# Altium PCB GPRSshield v1.4.pcbdoc
Units mil, origin at the board's own origin, x right, y up, seen from the top; angles counter-clockwise.
Board outline 2957.51 x 2255 mil, 2 copper layers (Top Layer, Bottom Layer); 79 components, 96 nets, 332 pads, 109 vias.
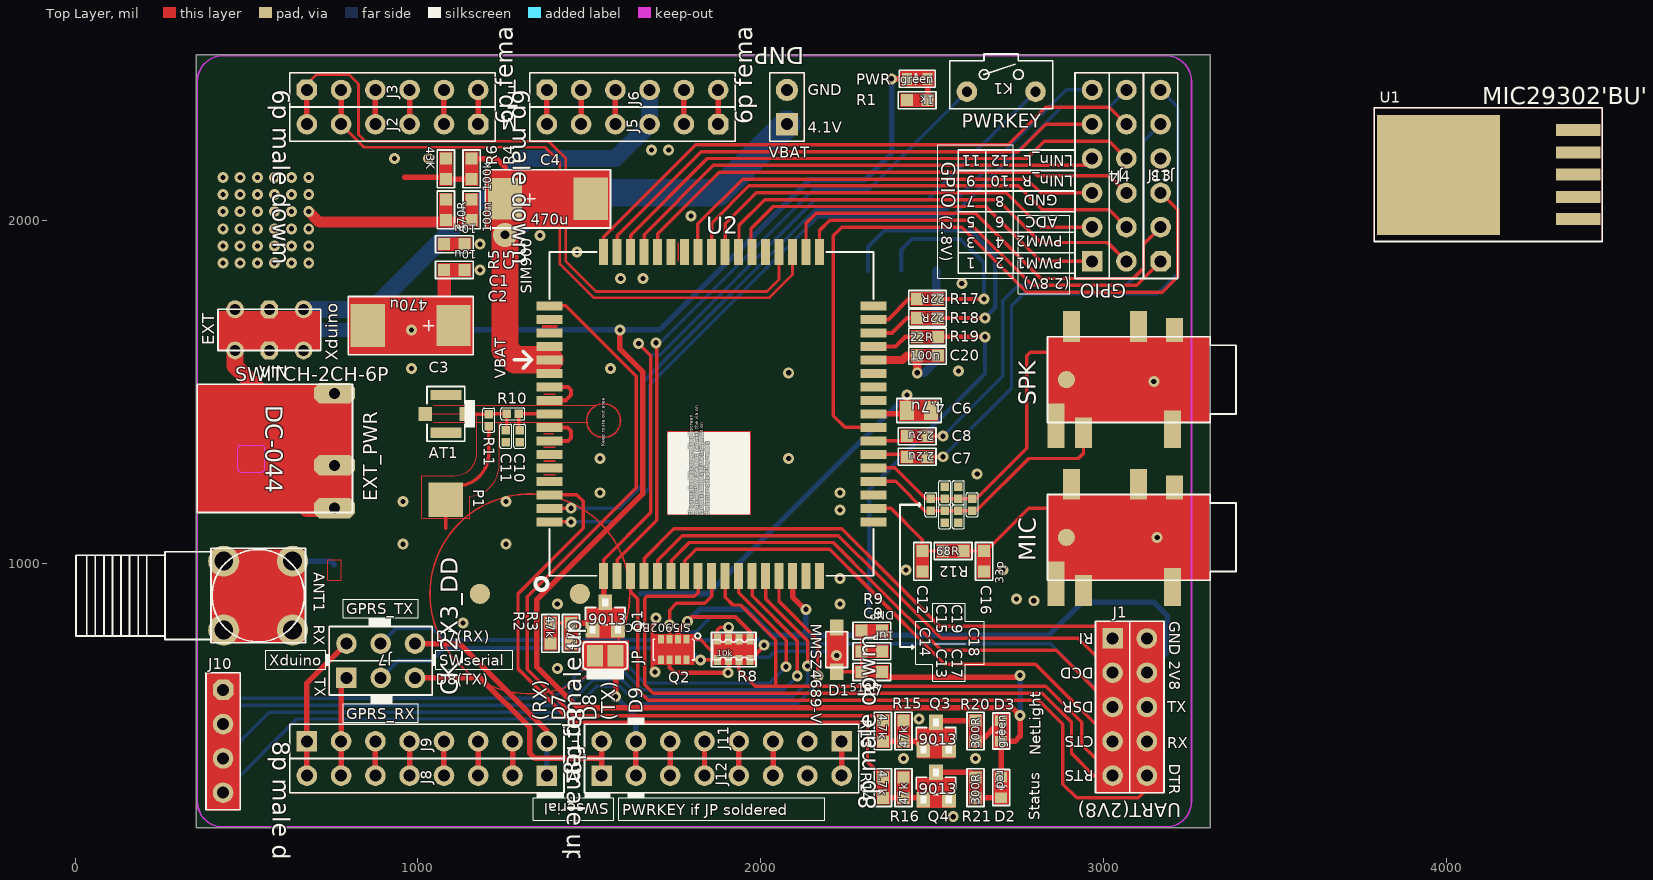
[diagram p0: Top Layer view]
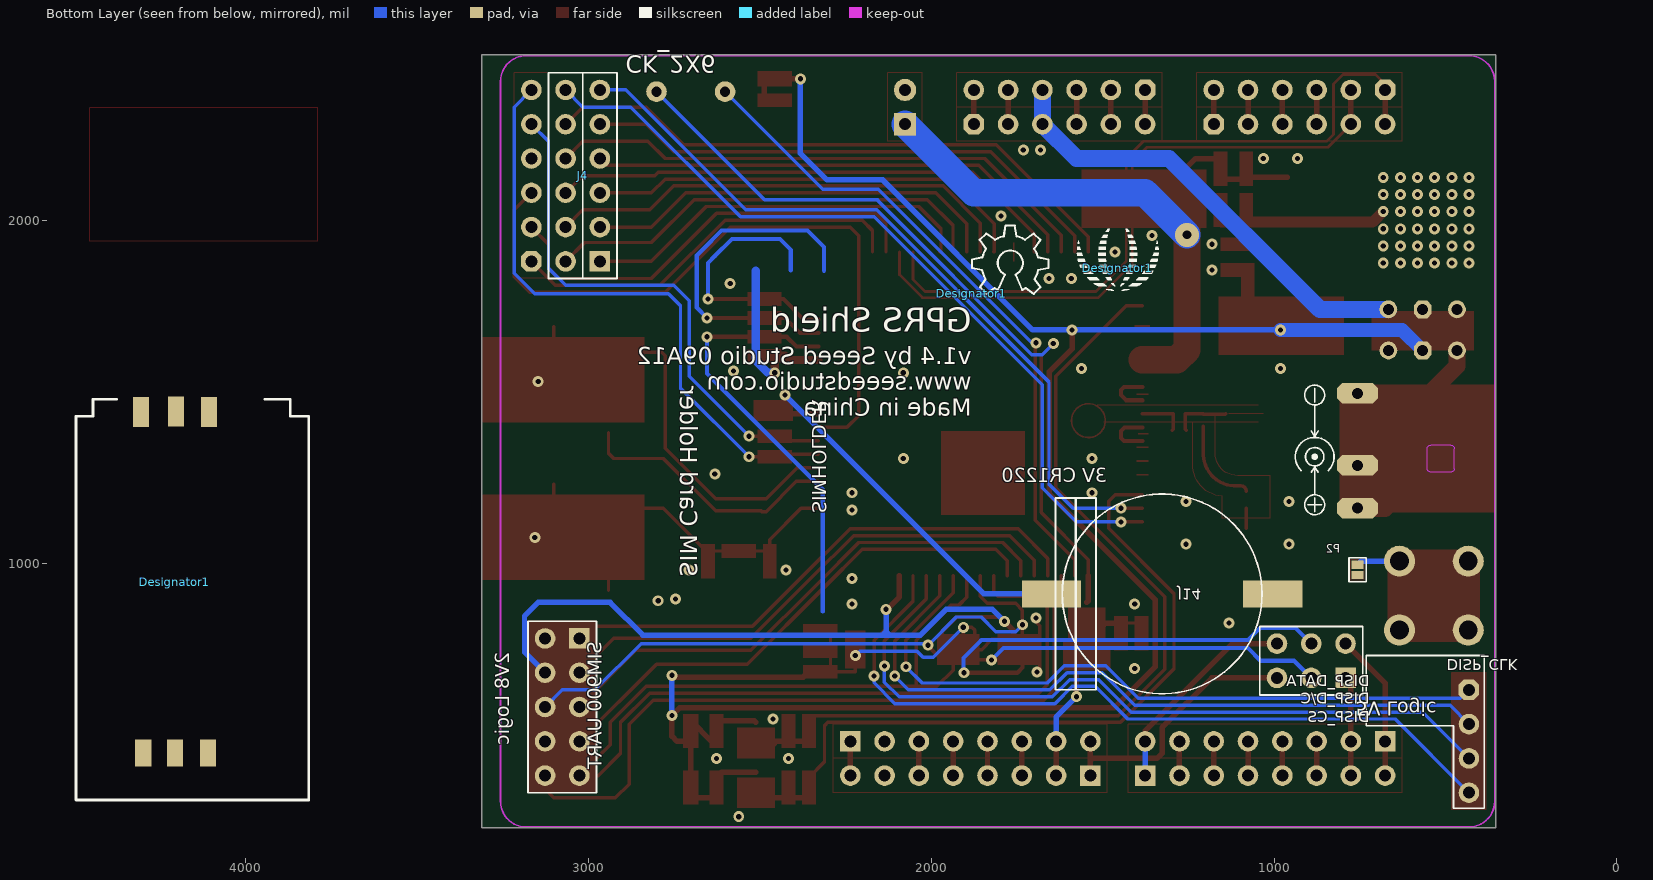
[diagram p1: Bottom Layer view, seen from below]

## Layer stack, top to bottom
Top Layer: signal copper 1.4
Dielectric: dielectric 12.6, FR-4, Dk 4.8
Bottom Layer: signal copper 1.4

## Board outline
354.06,229.44 3311.56,229.44 3311.56,2484.44 354.06,2484.44

## Design rules (kind name [scope] priority, off if disabled: settings)
Clearance [All] p1: gap=10
PolygonConnect [All] p1: connectstyle=Relief reliefconductorwidth=10 reliefentries=4 polygonreliefangle="90 Angle" airgapwidth=10
RoutingVias [All] p1: holewidth=28 width=50 viastyle="Through Hole" minholewidth=28 minwidth=50 maxholewidth=28 maxwidth=50
SilkscreenOverComponentPads [All] p1: minsilkscreentomaskgap=10
SolderMaskExpansion [All] p1: expansion=4
Width [All] p1: maxlimit=10 minlimit=10 preferedwidth=10
27 further rules are at their usual default settings.

## Components (designator, comment, footprint, x,y, rotation, side; value= is the part's Value field where it differs from the comment)
ANT1 "" SMA-TO-IPX 534,906.94 r270 top
AT1 "Comment" U-FL 1081.56,1436.94 r180 top
C1 "10u" 0603 1106.56,1931.94 r180 top
C2 "10u" 0603 1106.56,1856.94 r180 top
C3 "470u" AVX_D 979.05,1694.44 r180 top
C4 "470u" AVX_D 1379.06,2064.44 r0 top
C5 "100n" 0603 1156.56,2031.94 r90 top
C6 "4.7u" 0805 2461.56,1446.94 r180 top
C7 "2.2u" 0603@1 2456.56,1311.94 r180 top
C8 "2.2u" 0603@1 2456.56,1371.94 r180 top
C9 "1uF" 0603 2324.06,744.44 r180 top
C10 "Comment" 0402@1 1296.56,1371.94 r90 top
C11 "Comment" 0402@1 1256.56,1371.94 r90 top
C12 "Comment" 0603 2471.56,1006.94 r270 top
C13 "Comment" 0402@1 2536.56,1136.94 r270 top
C14 "Comment" 0402@1 2496.56,1171.94 r270 top
C15 "Comment" 0402@1 2536.56,1206.94 r270 top
C16 "33p" 0603 2651.56,1006.94 r90 top
C17 "Comment" 0402@1 2576.56,1136.94 r270 top
C18 "Comment" 0402@1 2616.56,1171.94 r270 top
C19 "Comment" 0402@1 2576.56,1206.94 r270 top
C20 "100n" 0603 2486.56,1606.94 r0 top
D1 "MMSZ4689-V" SOD123-2.7X1.6 2221.56,749.44 r270 top
D2 "red" D0603 2701.56,346.94 r270 top
D3 "green" D0603 2701.56,511.94 r90 top
Designator1 "Comment" SIMHOLDER3 4495,1480 r270 bottom (schematic designator SIMHOLDER)
Designator1 "Comment" OSHW_FILLX200_NOTEXT 1881.56,1786.94 r0 bottom (schematic designator LOGO2)
Designator1 "Comment" LOGO_SILK 1456.56,1861.94 r0 bottom (schematic designator LOGO1)
EXT_PWR "DC-044" DC-404 356.56,1286.94 r270 top
J1 "" 2X5P-2.54-LEADED 3076.56,581.94 r0 top
J2 "6p male dowm" CK_1X6 926,2281.94 r270 top
J3 "6p female up" CK_1X6 926,2381.94 r90 top
J4 "CK_2X6" CK_2X6 3016.56,2131.94 r180 bottom
J5 "6p male dowm" CK_1X6 1626,2281.94 r270 top
J6 "6p female up" CK_1X6 1626,2381.94 r90 top
J7 "CK_2X3_DD" CK_2X3 891.55,716.94 r90 top
J8 "8p male dowm" CK_1X8 1026,381.94 r270 top
J9 "8p female up" CK_1X8 1026,481.94 r90 top
J10 "" 4P-2.54 431.56,481.94 r0 top
J11 "8p female up" CK_1X8 1886,481.94 r270 top
J12 "8p male dowm" CK_1X8 1886,381.94 r90 top
J13 "" CK_1X6 3166.56,2131.94 r180 top
J14 "" CR1220 1326.56,911.94 r270 bottom
JP "" 2P-SMD-3.3X2 1546.56,731.94 r180 top
K1 "Comment" BTN_5.0_RST 2701.56,2376.94 r90 top
MIC "" 3.5-SMD 3386.56,1076.94 r0 top
P1 "Comment" JP 1081.56,1186.94 r270 top
P2 "Comment" 2P-SMD-1.78X1.27 756.55,981.94 r0 bottom
PWR "green" D0603 2456.56,2414.44 r0 top
Q1 "9013" SOT23 1546.56,846.94 r0 top
Q2 "Si5902BDC" 1206-8 1746.23,749.34 r180 top
Q3 "9013" SOT23 2511.56,496.94 r0 top
Q4 "9013" SOT23 2511.56,351.94 r0 top
R1 "1k" 0603@1 2456.56,2351.94 r180 top
R2 "47k" 0603 1386.56,796.94 r270 top
R3 "4.7k" 0603 1446.56,796.94 r90 top
R4 "100k" 0603 1156.56,2151.94 r90 top
R5 "470R" 0603 1081.56,2031.94 r90 top
R6 "43K" 0603 1081.56,2151.94 r270 top
R7 "510R" 0603 2324.06,684.44 r0 top
R8 "10k" 1206-8-3.3X2.4 1921.22,749.34 r0 top
R9 "DNP" 0603 2324.06,804.44 r180 top
R10 "Comment" 0402 1276.56,1436.94 r0 top
R11 "Comment" 0402 1206.56,1418.94 r90 top
R12 "68R" 0603 2561.56,1036.94 r0 top
R13 "4.7k" 0603 2356.56,511.94 r270 top
R14 "4.7k" 0603 2356.56,346.94 r270 top
R15 "47k" 0603 2416.56,511.94 r90 top
R16 "47k" 0603 2416.56,346.94 r90 top
R17 "22R" 0603 2486.56,1771.94 r180 top
R18 "22R" 0603 2486.56,1716.94 r180 top
R19 "22R" 0603 2486.56,1661.94 r0 top
R20 "300R" 0603 2626.56,511.94 r90 top
R21 "300R" 0603 2626.56,346.94 r90 top
SPK "" 3.5-SMD 3386.56,1536.94 r0 top
U1 "MIC29302'BU'" TO-263 4255,2135 r0 top
U2 "SIM900" SIM900 1856.56,1436.94 r90 top
VBAT "DNP" CK_1*2 2076.56,2331.94 r180 top
VIN "SWITCH-2CH-6P" 6P-2CH-2.54-7.6X3.0 566.55,1681.94 r270 top

## Footprints (in the part's own frame and the unit in brackets; to place one, negate y for a bottom-side part, rotate by r counter-clockwise, add the part's x,y. Pads: shape width x height; smd on the part's side, far side on the other; paste and mask are expansions set on the pad)
2P-SMD-1.78X1.27 [mil]
  rect 35x24 smd: 1(0,-15) 2(0,15)
  Bottom Layer lines w0.31: -20,30 20,30 20,-30 -20,-30 -20,30
  silkscreen extent -25,-35 25,35
2P-SMD-3.3X2 [mil]
  rect 46x63 smd: 1(-30,0) 2(30,0)
  Top Layer region: -68.5,-43.7 69.69,-43.7 69.69,44.1 -68.5,44.1
  silkscreen extent -65,-40 65,40
2X5P-2.54-LEADED [mil]
  rect 60x60 hole 35: 1(-50,200)
  round 60 hole 35: 2(-50,100) 3(-50,0) 4(-50,-100) 5(-50,-200) 6(50,-200) 7(50,-100) 8(50,0) 9(50,100) 10(50,200)
  Top Layer region: -100,-250 100,-250 100,250 -100,250
  Top Layer lines w0.31: -100,-250 -100,250 100,250 100,-250 -100,-250
  silkscreen extent -100,-250 100,250
3.5-SMD [mil]
  rect 50x70 smd: COM1(-180,145)
  rect 50x110 smd: COM2(-185,-145)
  rect 50x90 smd: L(-445,-155) R(-285,155) RS(-480,155)
  rect 50x130 smd: LS(-525,-135)
  round 50 smd: ""(-495,0)
  Top Layer region: -550,-125 -75,-125 -75,125 -550,125
  silkscreen extent -550,-125 0,125
4P-2.54 [mil]
  oct 60x60 hole 35: 1(0,150)
  round 60 hole 35: 2(0,50) 3(0,-50) 4(0,-150)
  Top Layer region: -50,-200 50,-200 50,200 -50,200
  Top Layer lines w0.31: -50,-200 -50,200 50,200 50,-200 -50,-200
  silkscreen extent -50,-200 50,200
6P-2CH-2.54-7.6X3.0 [mil]
  round 52 hole 32: CH1A(-60,100) CH1B(-60,-100) CH2A(60,100) CH2B(60,-100)
  oct 52x52 hole 32: COM1(-60,0) COM2(60,0)
  Top Layer region: -55,-150 60,-150 60,150 -55,150
  silkscreen extent -60,-150 60,150
0402 [mil]
  rect 25x25 smd: 1(-17.5,0) 2(17.5,0)
  silkscreen extent -35,-18 35,18
0402@1 [mil]
  rect 25x25 smd: 1(-17.5,0) 2(17.5,0)
  silkscreen extent -35,-18 35,18
0603 [mil]
  rect 35x35 smd: 1(-30,0) 2(30,0)
  Top Layer region: -50,-20 50,-20 50,20 -50,20
  silkscreen extent -55,-25 55,25
0603@1 [mil]
  rect 35x35 smd: 1(-30,0) 2(30,0)
  Top Layer region: -50,-20 50,-20 50,20 -50,20
  silkscreen extent -55,-25 55,25
0805 [mil]
  rect 40x55 smd: 1(-35,0) 2(35,0)
  Top Layer region: -57.5,-30 57.5,-30 57.5,30 -57.5,30
  silkscreen extent -65,-35 65,35
1206-8 [mil]
  rect 18x25 smd: 1(-37.5,-30) 2(-12.5,-30) 3(12.5,-30) 4(37.5,-30) 5(37.5,30) 6(12.5,30) 7(-12.5,30) 8(-37.5,30)
  Top Layer region: -60,-45 60,-45 60,45 -60,45
  silkscreen extent -78,-48 60,30
1206-8-3.3X2.4 [mil]
  rect 20x30 smd: 1(-47.5,-30) 2(-15,-30) 3(15,-30) 4(47.5,-30) 5(47.5,30) 6(15,30) 7(-15,30) 8(-47.5,30)
  Top Layer region: -62.5,-45 62.5,-45 62.5,45 -62.5,45
  silkscreen extent -65,-50 65,50
AVX_D [mil]
  rect 100x120 smd: +(-125,0)
  rect 100x125 smd: -(125,0)
  Top Layer region: -182.5,-85 182.5,-85 182.5,85 -182.5,85
  silkscreen extent -183,-85 182,85
BTN_5.0_RST [mil]
  round 60 hole 30: P$1(0,100) P$2(0,-100)
  silkscreen extent -50,-150 110,150
CK_1*2 [mil]
  rect 65x65 hole 35: 1(0,50)
  round 65 hole 35: 2(0,-50)
  Top Layer lines w0.31: 50,100 50,-100 -50,-100 -50,100 50,100
  silkscreen extent -50,-100 50,100
CK_1X6 [mil]
  oct 60x60 hole 35: 1(0,250)
  round 60 hole 35: 2(0,150) 3(0,50) 4(0,-50) 5(0,-150) 6(0,-250)
  Top Layer lines w0.31: 50,-300 -50,-300 -50,300 50,300 50,-300
  silkscreen extent -50,-300 50,300
CK_1X8 [mil]
  rect 60x60 hole 35: 1(0,350)
  round 60 hole 35: 2(0,250) 3(0,150) 4(0,50) 5(0,-50) 6(0,-150) 7(0,-250) 8(0,-350)
  Top Layer lines w0.31: 50,-400 -50,-400 -50,400 50,400 50,-400
  silkscreen extent -50,-400 50,400
CK_2X3 [mil]
  rect 60x60 hole 35: 1(-50,100)
  round 60 hole 35: 2(-50,0) 3(-50,-100) 4(50,-100) 5(50,0) 6(50,100)
  Top Layer lines w0.31: -100,150 -100,-150 100,-150 100,150 -100,150
  silkscreen extent -100,-150 100,150
CK_2X6 [mil]
  rect 60x60 hole 35: 1(50,-250)
  round 60 hole 35: 2(50,-150) 3(50,-50) 4(50,50) 5(50,150) 6(50,250) 7(-50,250) 8(-50,150) 9(-50,50) 10(-50,-50) 11(-50,-150) 12(-50,-250)
  Bottom Layer lines w0.31: 100,-300 100,300 -100,300 -100,-300 100,-300
  silkscreen extent -100,-300 100,300
CR1220 [mm]
  rect 2x4.4 smd: +(0,-8.2) -(0,8.2)
  round 1.5 smd far side: ""(0,-3.7) ""(0,3.7)
  Bottom Layer circle w0.127: c0,0 r7.4
  silkscreen extent -7.4,-7.9 7.4,7.4
D0603 [mil]
  rect 30x35 smd: +(-30,0) -(30,0)
  Top Layer region: -50,-22.5 50,-22.5 50,22.5 -50,22.5
  silkscreen extent -53,-25 53,25
DC-404 [mil]
  oct 60x120 hole 32: +(125,400) -(-210,400) CDN(0,400)
  Top Layer region: -236.22,0 137.8,0 137.8,452.76 -236.22,452.76
  Keep-Out Layer lines w1: 9.69,118.11 ccw(c9.69,128.11) 19.69,128.11 19.69,186.85 ccw(c9.69,186.85) 9.69,196.85 -49.05,196.85 ccw(c-49.05,186.85) -59.05,186.85 -59.05,128.11 ccw(c-49.05,128.11) -49.05,118.11 9.69,118.11
  silkscreen extent -236,0 138,453
JP [mil]
  rect 50x100 smd: 1(-25,0) 2(25,0)
LOGO_SILK [mil]
  silkscreen extent -121,-124 119,66
OSHW_FILLX200_NOTEXT [mil]
  silkscreen extent -223,-200 0,0
SIM900 [mil]
  rect 76x26 smd: 1(-472.44,314.97) 2(-472.44,275.6) 3(-472.44,236.23) 4(-472.44,196.86) 5(-472.44,157.49) 6(-472.44,118.12) 7(-472.44,78.75) 8(-472.44,39.37) 9(-472.44,0) 10(-472.44,-39.37) 11(-472.44,-78.74) 12(-472.44,-118.11) 13(-472.44,-157.48) 14(-472.44,-196.85) 15(-472.44,-236.22) 16(-472.44,-275.59) 17(-472.44,-314.96) 35(472.44,-314.96) 36(472.44,-275.59) 37(472.44,-236.22) 38(472.44,-196.85) 39(472.44,-157.48) 40(472.44,-118.11) 41(472.44,-78.74) 42(472.44,-39.37) 43(472.44,0) 44(472.44,39.37) 45(472.44,78.75) 46(472.44,118.12) 47(472.44,157.49) 48(472.44,196.86) 49(472.44,236.23) 50(472.44,275.6) 51(472.44,314.97)
  rect 26x76 smd: 18(-314.96,-472.44) 19(-275.59,-472.44) 20(-236.22,-472.44) 21(-196.85,-472.44) 22(-157.48,-472.44) 23(-118.11,-472.44) 24(-78.74,-472.44) 25(-39.37,-472.44) 26(0,-472.44) 27(39.37,-472.44) 28(78.74,-472.44) 29(118.11,-472.44) 30(157.48,-472.44) 31(196.85,-472.44) 32(236.22,-472.44) 33(275.59,-472.44) 34(314.96,-472.44) 52(314.96,472.45) 53(275.59,472.45) 54(236.22,472.45) 55(196.85,472.45) 56(157.48,472.45) 57(118.11,472.45) 58(78.74,472.45) 59(39.37,472.45) 60(0,472.45) 61(-39.37,472.45) 62(-78.74,472.45) 63(-118.11,472.45) 64(-157.48,472.45) 65(-196.85,472.45) 66(-236.22,472.45) 67(-275.59,472.45) 68(-314.96,472.45)
  Top Layer circle w5: c-19.69,314.97 r49.33
  silkscreen extent -514,-472 472,514
SIMHOLDER3 [mm]
  rect 2.2x1.2 smd: 1(0.95,4.81) 2(0.91,7.41) 3(0.95,9.86)
  rect 2x1.2 smd: 4(26.2,9.78) 5(26.22,7.34) 6(26.22,4.98)
  silkscreen extent 0,0 29.7,17.25
SMA-TO-IPX [mm]
  round 2.3 hole 1.4: 1(-2.55,2.55) 2(2.55,2.55) 3(2.55,-2.55) 4(-2.55,-2.55)
  Top Layer region: -3.429,-3.429 3.429,-3.429 3.429,3.429 -3.429,3.429
  silkscreen extent -3.5,-13.5 3.5,3.5
SOD123-2.7X1.6 [mm]
  rect 1.2x1.02 smd: 1(-1.635,0) 2(1.635,0)
  Top Layer region: 1.397,0.762 -1.397,0.762 -1.397,-0.762 1.397,-0.762
  silkscreen extent -1.32,-0.8 1.33,0.8
SOT23 [mil]
  rect 40x45 smd: 1(-37.41,-40) 2(37.4,-40) 3(0,40)
  Top Layer region: -55,-65 55,-65 55,25 -55,25
  silkscreen extent -58,-51 58,51
TO-263 [mil]
  rect 130x35 smd: 1(130,-130) 2(130,-65) 3(130,0) 4(130,65) 5(130,130)
  rect 359.06x350 smd: TAB(-278.39,-1.18)
  Top Layer lines w0.31: -465,-195 -465,195 200.01,195 200.01,-195 -465,-195
  silkscreen extent -465,-195 200,195
U-FL [mil]
  rect 40x40 smd: D(-60,0) GND3(60,0)
  rect 90x30 smd: GND1(0,55) GND2(0,-55)
  silkscreen extent -85,-80 55,80

## Via types
v1: diameter 32, hole 15, Top Layer to Bottom Layer, 108 vias
v2: diameter 70, hole 25, Top Layer to Bottom Layer, 1 vias

## Nets (pads, with @x,y where several pads share a name; then routed paths per layer and width w, separated by ;. In a path a pad name is that pad's centre, name@x,y a point inside that pad or via, vN(x,y) a via of type N, cw(c..) or ccw(c..) an arc to the next point about the centre after c; other vN are vias at no path point)
ADC: J13.3 U2.25 | length 2035.1
  Top Layer w10: U2.25 2245.93,1397.57 2211.56,1431.94 2211.56,1956.94 2236.56,1981.94 2586.56,1981.94 2776.56,1791.94 3171.56,1791.94 3216.56,1836.94 3216.56,2031.94 J13.3
CTS: J1.4 U2.7 | length 1538.4
  Top Layer w10: U2.7 1777.81,1008.2 1811.56,1041.94 2201.56,1041.94 2311.56,931.94 2536.56,706.94 2801.56,706.94 J1.4
D9: J11.7 J12.2 JP.1 | length 374.6
  Top Layer w16: v1(1576.56,611.94) JP.1 ; J12.2 J11.7
  Bottom Layer w16: v1(1576.56,611.94) 1636,552.49 J11.7
DCD: J1.2 U2.5 | length 1568.2
  Top Layer w10: U2.5 1699.07,1009.46 1771.56,1081.94 2226.56,1081.94 2351.56,956.94 2526.56,781.94 2926.56,781.94 J1.2
DISP_CLK: J10.1 U2.11 | length 2055.1
  Top Layer w10: U2.11 1935.3,915.7 2074.06,776.94 v1(2074.06,699.44)
  Bottom Layer w10: J10.1 456.56,606.94 1396.56,606.94 1491.56,701.94 1611.56,701.94 1661.56,651.94 2026.56,651.94 v1(2074.06,699.44)
DISP_CS: J10.4 U2.14 | length 2268.1
  Top Layer w10: U2.14 2053.41,890.09 2166.56,776.94 v1(2166.56,671.94)
  Bottom Layer w10: J10.4 646.55,546.94 1426.56,546.94 1521.56,641.94 1589.06,641.94 1639.06,591.94 2106.09,591.94 2166.56,652.4 v1(2166.56,671.94)
DISP_D/C: J10.3 U2.13 | length 2199.3
  Top Layer w10: U2.13 2014.04,896.96 2136.56,774.44 v1(2136.56,701.94)
  Bottom Layer w10: J10.3 566.55,566.94 1416.56,566.94 1511.56,661.94 1596.56,661.94 1646.56,611.94 2093.84,611.94 2136.56,654.66 v1(2136.56,701.94)
DISP_DATA: J10.2 U2.12 | length 2121.6
  Top Layer w10: U2.12 1974.67,906.33 2106.56,774.44 v1(2106.56,671.94)
  Bottom Layer w10: J10.2 486.56,586.94 1406.56,586.94 1501.56,681.94 1604.06,681.94 1654.06,631.94 2066.56,631.94 v1(2106.56,671.94)
DSR: J1.3 U2.6 | length 1553.3
  Top Layer w10: U2.6 1738.44,1008.83 1791.56,1061.94 2211.56,1061.94 2331.56,941.94 2526.56,746.94 2861.56,746.94 J1.3
GND: AT1.GND1 AT1.GND2 AT1.GND3 C1.1 C2.1 C3.- C4.- C5.1 C6.1 C9.1 C10.1 C11.1 C12.2 C13.2 C15.1 C16.1 C17.2 C19.1 C20.2 D1.1 Designator1.6 EXT_PWR.- J1.10 J5.4 J5.5 J6.2 J6.3 J11.2 J12.7 J13.4 J14.- MIC.COM1 MIC.COM2 P1.2 P2.2 Q1.2 Q3.2 Q4.2 R1.2 R2.2 R5.1 R6.1 R9.1 R15.2 R16.2 SPK.COM1 SPK.COM2 U1.3 U1.TAB U2.17 U2.18 U2.20 U2.29 U2.39 U2.45 U2.46 U2.53 U2.54 U2.58 U2.59 U2.61 U2.62 U2.63 U2.64 U2.65 VBAT.2 | length 1213.7
  Top Layer w10: 1081.56,1103.94 P1.2 ; v1(1691.56,684.44) 1684.06,691.94 1684.06,819.44 1694.06,829.44 v1(1694.06,841.94)
  Top Layer w12: U2.62 1437.81,1358.2 1446.56,1366.94 1446.56,1386.94 1436.56,1396.94 1384.74,1396.94 U2.61 ; U2.59 1384.74,1476.94 1431.56,1476.94 1446.56,1491.94 1446.56,1506.94 1437.81,1515.68 U2.58
  Top Layer w16: J5.5 J6.2 ; J5.4 J6.3
  Top Layer w32: v1(681.55,2026.94) 708.63,1999.87 ccw(c715.7,2006.94) 715.7,1996.94 961.55,1996.94 1154.06,1996.94 C5.1@1156.56,1999.44
  other v1: 2561.56,261.94 2416.56,431.94 2626.56,431.94 2461.56,546.94 1406.56,694.44 1131.56,826.94 1406.56,881.94 2231.56,881.94 2796.56,891.94 2746.56,896.94 2231.56,956.94 2424.06,981.94 2706.56,981.94 956.55,1056.94 1256.56,1056.94 3156.56,1076.94 2231.56,1156.94 956.55,1181.94 1256.56,1181.94 1531.56,1206.94 2231.56,1206.94 2631.56,1261.94 1531.56,1306.94 2081.56,1306.94 3146.56,1531.94 2081.56,1556.94 2576.56,1561.94 981.55,1569.44 1561.56,1569.44 2586.56,1816.94 1591.56,1831.94 1656.56,1831.94 1181.56,1856.94 431.56,1876.94 481.56,1876.94 531.55,1876.94 581.55,1876.94 631.55,1876.94 681.55,1876.94 1464.06,1909.44 431.56,1926.94 481.56,1926.94 531.55,1926.94 581.55,1926.94 631.55,1926.94 681.55,1926.94 1181.56,1931.94 1356.56,1956.94 431.56,1976.94 481.56,1976.94 531.55,1976.94 581.55,1976.94 631.55,1976.94 681.55,1976.94 1796.56,2014.44 431.56,2026.94 481.56,2026.94 531.55,2026.94 581.55,2026.94 631.55,2026.94 431.56,2076.94 481.56,2076.94 531.55,2076.94 581.55,2076.94 631.55,2076.94 681.55,2076.94 431.56,2126.94 481.56,2126.94 531.55,2126.94 581.55,2126.94 631.55,2126.94 681.55,2126.94 931.55,2181.94 1031.56,2181.94 1681.56,2206.94 1731.56,2206.94
GPIO1: J4.1 U2.40 | length 1157
  Top Layer w10: U2.40 1971.56,1912.49 1971.56,1976.94 2036.56,2041.94 2656.56,2041.94 2816.56,1881.94 J4.1
GPIO2: J4.12 U2.41 | length 1313.7
  Top Layer w10: U2.41 1936.56,1910.64 1936.56,1986.94 2011.56,2061.94 2691.56,2061.94 2816.56,1936.94 3011.56,1936.94 J4.12
GPIO3: J4.2 U2.42 | length 1231.5
  Top Layer w10: U2.42 1896.56,1910.01 1896.56,1991.94 1986.56,2081.94 2716.56,2081.94 2816.56,1981.94 J4.2
GPIO4: J4.11 U2.43 | length 1388.4
  Top Layer w10: U2.43 1856.56,1992.94 1965.56,2101.94 2751.56,2101.94 2821.56,2031.94 3016.56,2031.94 J4.11
GPIO5: J4.3 U2.44 | length 1302.9
  Top Layer w10: U2.44 1816.56,1910.01 1816.56,1991.43 1947.06,2121.94 2776.56,2121.94 2816.56,2081.94 J4.3
GPIO6: J4.10 U2.47 | length 1519.5
  Top Layer w10: U2.47 1699.07,1961.96 1879.06,2141.94 2796.56,2141.94 2806.56,2131.94 3016.56,2131.94 J4.10
GPIO7: J4.4 U2.48 | length 1449.1
  Top Layer w10: U2.48 1659.7,1959.54 1862.1,2161.94 2946.56,2161.94 J4.4
GPIO8: J4.9 U2.49 | length 1630.6
  Top Layer w10: U2.49@1621.56,1909.38 U2.49 1620.33,1958.55 1843.72,2181.94 2776.56,2181.94 2826.56,2231.94 3016.56,2231.94 J4.9
GPIO9: J4.5 U2.50 | length 1567.4
  Top Layer w10: U2.50 1580.96,1956.35 1826.56,2201.94 2751.56,2201.94 2831.56,2281.94 J4.5
GPIO10: J4.8 U2.51 | length 1746.4
  Top Layer w10: U2.51 1541.56,1953.24 1810.26,2221.94 2721.56,2221.94 2831.56,2331.94 3016.56,2331.94 J4.8
GPIO11: J4.6 U2.67 | length 2262.6
  Top Layer w10: U2.67 1445.96,1161.35 v1(1446.56,1161.94)
  Bottom Layer w10: v1(1446.56,1161.94) 1586.56,1161.94 1656.56,1231.94 1656.56,1529.93 2158.56,2031.94 2541.56,2031.94 2891.56,2381.94 J4.6
GPIO12: J4.7 U2.68 | length 2380.6
  Top Layer w10: U2.68@1384.09,1121.9 v1(1446.56,1121.94)
  Bottom Layer w10: v1(1446.56,1121.94) 1577.02,1121.94 1676.56,1221.47 1676.56,1521.94 2166.56,2011.94 2556.56,2011.94 2876.56,2331.94 3016.56,2331.94 J4.7
HRXD: J7.2 Q2.7 Q2.8 R8.1 | length 1139.9
  Top Layer w10: Q2.7 1758.73,736.05 1764.61,741.94 1779.06,741.94 1784.06,736.94 1784.06,719.67 Q2.8 ; Q2.8@1783.73,721.61 Q2.8 ; R8.1 v1(1824.06,719.34) Q2.8
  Bottom Layer w12: J7.2 941.55,716.94 1039.06,716.94 1076.56,754.44 1789.06,754.44 1824.06,719.44 v1(1824.06,719.34)
HTXD: J7.5 Q2.5 Q2.6 R8.2 | length 1387.5
  Top Layer w10: v1(1904.06,681.94) 1906.22,684.11 R8.2
  Top Layer w12: Q2.5 1708.73,721.61 1716.56,729.44 1726.56,729.44 1733.73,722.26 Q2.6 1733.73,697.26 1749.06,681.94 v1(1904.06,681.94)
  Bottom Layer w12: J7.5 937.33,812.71 1040.78,812.71 1076.56,776.94 1854.06,776.94 1906.56,724.44 1906.56,684.44 v1(1904.06,681.94)
LDBG_RX: U2.28
LDBG_TX: U2.27
LDTR: J1.6 U2.3 | length 2109.7
  Top Layer w10: U2.3 1621.56,963.27 1621.56,916.94 1641.56,896.94 1641.56,631.94 1671.56,601.94 2811.56,601.94 2881.56,531.94 2881.56,356.94 2921.56,316.94 3101.56,316.94 3126.56,341.94 J1.6
LINEIN_L: C8.2 U2.24 | length 103.2
  Top Layer w10: U2.24 2412.81,1358.2 C8.2
LINEIN_R: C7.2 U2.23 | length 100.4
  Top Layer w10: U2.23 2419.67,1318.83 C7.2
LRTS: J1.5 U2.8 | length 1990
  Top Layer w10: U2.8 1817.19,915.35 1806.27,904.44 1668.14,904.44 1662.08,898.37 1662.08,646.41 1686.56,621.94 2821.56,621.94 2906.56,536.94 2906.56,446.94 2971.56,381.94 J1.5
LRXD: J1.7 Q2.1 R8.3 U2.10 | length 1972
  Top Layer w10: Q2.1 1783.98,779.09 1823.55,779.09 1853.3,749.34 1926.46,749.34 1926.56,749.44 1936.22,739.77 R8.3 1936.22,689.77 1984.06,641.94 2044.06,641.94 ; U2.10 1895.93,902.57 1919.06,879.44 1941.56,879.44 2044.06,776.94 2044.06,641.94 ; J1.7 3076.56,431.94 2976.56,431.94 2936.56,471.94 2936.56,536.94 2831.56,641.94 2044.06,641.94
LTXD: J1.8 Q2.3 R8.4 U2.9 | length 1880.3
  Top Layer w10: Q2.3 1734.06,779.67 v1(1734.06,821.94) 1734.06,864.44 1754.06,884.44 1836.56,884.44 1856.56,904.44 U2.9 ; R8.4@1968.55,721.67 1968.55,719.51 R8.4 1968.72,721.61 R8.4@1969.06,721.94
  Top Layer w12: R8.4@1968.55,721.67 R8.4@1968.79,721.67 ; R8.4 2009.06,759.67 v1(2009.06,762.18)
  Bottom Layer w10: v1(1734.06,821.94) 1754.06,801.94 1811.56,801.94 1854.06,844.44 1926.56,844.44 2008.81,762.18 v1(2009.06,762.18) 2013.81,766.94 2846.56,766.94 2981.56,631.94 3076.56,631.94 J1.8
MRXD: J7.1 J8.7 J9.2 | length 291.4
  Top Layer w16: J8.7 J9.2 776,651.38 J7.1
MTXD: J7.6 J8.8 J9.1 | length 432.9
  Top Layer w16: J8.8 J9.1 676,651.38 J7.6
N$1: C10.2 R10.2 U2.60 | length 138.6
  Top Layer w10: C10.2 1294.06,1391.94 R10.2 U2.60
N$2: R4.1 R6.2 U1.5 | length 197.1
  Top Layer w16: 961.55,2126.94 1076.56,2126.94 R6.2 R4.1
N$3: Q3.3 R20.2 | length 117.1
  Top Layer w16: Q3.3 2516.56,541.94 R20.2
N$4: Designator1.4 R19.2 | length 1085.9
  Top Layer w12: R19.2 v1(2654.06,1661.94)
  Bottom Layer w12: 2316.52,860.44 2316.52,1216.9 2631.56,1531.94 ; 2636.56,1536.94 2631.56,1531.94 ; v1(2654.06,1661.94) 2654.06,1554.44 2631.56,1531.94
N$5: Designator1.3 R18.1 | length 822.3
  Top Layer w12: R18.1 v1(2654.06,1716.94)
  Bottom Layer w12: 2313.37,1854.53 2313.37,1923.75 2361.56,1971.94 2611.56,1971.94 2666.56,1916.94 2684.06,1899.44 2684.06,1746.94 v1(2654.06,1716.94)
N$6: Designator1.2 R17.1 | length 583
  Top Layer w12: R17.1 v1(2651.56,1771.94)
  Bottom Layer w12: 2409.82,1856.11 2409.82,1915.2 2441.56,1946.94 2581.56,1946.94 2631.56,1896.94 2651.56,1876.94 v1(2651.56,1771.94)
N$7: D3.- R20.1 | length 99.9
  Top Layer w16: R20.1 2641.56,481.94 D3.-
N$8: Q3.1 R13.2 R15.1 | length 128.7
  Top Layer w16: R13.2 R15.1 2451.56,481.94 Q3.1
N$9: C9.2 D1.2 R7.1 R8.7 R8.8 R9.2 | length 701.9
  Top Layer w10: R8.8 1873.72,806.61 1881.56,814.44 v1(1906.56,814.44) 1906.22,814.11 R8.7 ; v1(2221.56,731.94) D1.2 2293.43,685.07 R7.1 C9.2 R9.2
  Bottom Layer w10: v1(1906.56,814.44) 1994.06,726.94 2024.06,726.94 2041.56,744.44 2209.06,744.44 v1(2221.56,731.94)
N$10: R13.1 U2.52 | length 2423.3
  Top Layer w10: U2.52 1431.06,1751.9 1636.56,1546.4 1636.56,1221.94 1318.64,904.02 1318.64,692.68 1454.38,556.94 2341.56,556.94 R13.1
N$11: K1.P$1 U2.2 | length 1939.8
  Top Layer w10: U2.2 1581.56,965.09 1581.56,1011.94 1696.56,1126.94 1696.56,1626.94 1696.56,1641.94 v1(1694.06,1644.44)
  Bottom Layer w10: v1(1694.06,1644.44) 1706.56,1644.44 2154.06,2091.94 2316.56,2091.94 K1.P$1
N$12: ANT1.1 ANT1.2 ANT1.3 ANT1.4 P2.1 | length 728.8
  Top Layer w16: ANT1.3 ANT1.4 ANT1.1 ANT1.2
  Bottom Layer w16: ANT1.1 746.16,1007.33 P2.1
N$13: C12.1 R12.1 U2.19 | length 273.4
  Top Layer w10: U2.19 2380.05,1161.35 2471.56,1069.84 C12.1 R12.1
N$14: JP.2 R3.1 | length 84.5
  Top Layer w16: R3.1 1481.56,766.94 JP.2
N$15: C13.1 C14.2 C17.1 C18.2 SPK.L U2.21 | length 779.5
  Top Layer w10: U2.21 2393.41,1240.09 2481.56,1151.94 2494.06,1151.94 C14.2 C13.1 C17.1 C18.2 2629.06,1154.44 2781.56,1306.94 2926.56,1306.94 2941.56,1321.94 SPK.L
N$16: Q4.3 R21.2 | length 121.2
  Top Layer w16: Q4.3 2611.56,391.94 R21.2
N$17: D2.- R21.1 | length 75
  Top Layer w16: R21.1 D2.-
N$18: Q4.1 R14.2 R16.1 | length 120.6
  Top Layer w16: R14.2 R16.1 2471.56,316.94 Q4.1
N$19: C14.1 C15.2 C18.1 C19.2 SPK.R U2.22 | length 1214.2
  Top Layer w10: U2.22 2391.56,1279.46 2481.57,1189.44 C14.1 C15.2 C19.2 C18.1 2629.06,1189.44 2776.56,1336.94 2776.56,1606.94 2786.56,1616.94 3091.56,1616.94 3101.56,1626.94 SPK.R
N$20: R14.1 U2.66 | length 1931.1
  Top Layer w10: U2.66 1463.82,1200.72 1482.51,1182.03 1482.51,1102.89 1291.95,912.33 1291.95,693.11 1448.12,536.94 2301.56,536.94 2311.56,526.94 2311.56,421.94 R14.1
N$21: AT1.D C11.2 R10.1 R11.2 | length 166.6
  Top Layer w10: AT1.D ccw(c1142.05,1436.93) 1142.05,1436.43 R11.2 cw(c1207.05,1436.44) 1207.05,1436.94 R10.1 1259.06,1391.94 C11.2
N$22: P1.1 R11.1 | length 267.5
  Top Layer w10: P1.1 cw(c1096.56,1211.94) 1096.56,1226.94 1106.56,1226.94 ccw(c1111.56,1321.94) 1206.56,1316.94 R11.1
N$23: C7.1 J13.6 | length 1647.9
  Top Layer w10: C7.1 v1(2531.56,1311.94)
  Bottom Layer w10: v1(2531.56,1311.94) 2731.56,1511.94 2731.56,1751.94 2766.56,1786.94 3156.56,1786.94 3216.56,1846.94 3216.56,2331.94 J13.6
N$24: J8.6 J9.3 | length 100
  Top Layer w16: J8.6 J9.3
N$25: J8.5 J9.4 | length 100
  Top Layer w16: J8.5 J9.4
N$26: J8.4 J9.5 | length 100
  Top Layer w16: J8.4 J9.5
N$27: J8.3 J9.6 | length 100
  Top Layer w16: J8.3 J9.6
N$28: J8.2 J9.7 | length 100
  Top Layer w16: J8.2 J9.7
N$29: C8.1 J13.5 | length 1402.5
  Top Layer w10: C8.1 v1(2531.56,1371.94)
  Bottom Layer w10: v1(2531.56,1371.94) 2706.56,1546.94 2706.56,1766.94 2751.56,1811.94 3066.56,1811.94 3116.56,1861.94 3116.56,2231.94 J13.5
N$30: C16.2 MIC.L MIC.R R12.2 | length 918.7
  Top Layer w0.31: C16.2 C16.2@2656.56,1036.94
  Top Layer w10: R12.2 2656.56,1036.94 2781.56,1161.94 2966.56,1161.94 ; MIC.L 2941.56,1001.94 2976.56,1036.94 2976.56,1151.94 ; MIC.R 3101.56,1171.94 3091.56,1161.94 2986.56,1161.94 ; 2966.56,1161.94 2976.56,1151.94 ; 2966.56,1161.94 2976.56,1161.94 ; 2976.56,1151.94 2986.56,1161.94 ; 2976.56,1151.94 2976.56,1161.94 ; 2976.56,1161.94 2986.56,1161.94
  Top Layer w16: C16.2@2656.56,1031.94 C16.2@2656.56,1036.94
N$32: J11.6 J12.3 | length 100
  Top Layer w16: J12.3 J11.6
N$33: J11.5 J12.4 | length 100
  Top Layer w16: J12.4 J11.5
N$34: J11.4 J12.5 | length 100
  Top Layer w16: J12.5 J11.4
N$35: J11.3 J12.6 | length 100
  Top Layer w16: J12.6 J11.3
N$36: Q1.1 R2.1 R3.2 | length 131.6
  Top Layer w10: R2.1 R3.2
  Top Layer w16: R3.2 1491.56,826.94 Q1.1
N$37: J11.1 J12.8 | length 100
  Top Layer w16: J12.8 J11.1
N$41: J2.4 J3.3 | length 100
  Top Layer w16: J2.4 J3.3
N$42: J2.3 J3.4 | length 100
  Top Layer w16: J2.3 J3.4
N$43: J2.2 J3.5 | length 100
  Top Layer w16: J2.2 J3.5
N$44: J2.1 J3.6 | length 100
  Top Layer w16: J2.1 J3.6
N$45: J5.6 J6.1 | length 100
  Top Layer w16: J5.6 J6.1
N$49: J5.2 J6.5 | length 100
  Top Layer w16: J5.2 J6.5
N$50: J5.1 J6.6 | length 100
  Top Layer w16: J5.1 J6.6
N$53: PWR.- R1.1 | length 66.6
  Top Layer w16: R1.1 2481.56,2356.94 2486.56,2361.94 PWR.-
PWM1: J13.1 U2.35 | length 1177.7
  Top Layer w10: U2.35 2171.52,1971.9 2201.56,2001.94 2601.56,2001.94 2791.56,1811.94 3096.56,1811.94 J13.1
PWM2: J13.2 U2.36 | length 1311.6
  Top Layer w10: U2.36 2132.15,1992.53 2161.56,2021.94 2626.56,2021.94 2816.56,1831.94 3086.56,1831.94 3116.56,1861.94 3116.56,1931.94 J13.2
PWRKEY: K1.P$2 Q1.3 U2.1 | length 2318.9
  Top Layer w10: U2.1 1541.56,1011.94 1679.06,1149.44 1679.06,1591.94 1679.06,1606.94 v1(1644.06,1641.94)
  Top Layer w16: U2.1 1541.56,891.94 Q1.3
  Bottom Layer w10: v1(1644.06,1641.94) 1676.56,1609.44 1706.56,1609.44 1711.56,1614.44 2156.56,2059.44 2156.56,2061.94 2486.56,2061.94 K1.P$2
RI: J1.1 U2.4 | length 1586
  Top Layer w10: U2.4 1659.7,1015.09 1746.56,1101.94 2236.56,1101.94 2371.56,966.94 2521.56,816.94 2991.56,816.94 J1.1
SCL: J2.6 J3.1 U2.38 | length 2125
  Top Layer w8: J3.1 676.55,2382.49 676.55,2399.44 704.45,2427.33 798.43,2427.33 826.55,2399.2 826.55,2251.94 846.55,2231.94 1381.56,2231.94 1431.56,2181.94 1431.56,1881.94 1519.35,1794.14 2018.18,1794.14 2053.41,1829.36 U2.38
  Top Layer w16: J2.6 J3.1
SDA: J2.5 J3.2 U2.37 | length 1894.7
  Top Layer w8: J2.5 843.5,2214.44 1371.56,2214.44 1414.06,2171.94 1414.06,1874.44 1512.58,1775.92 2025.53,1775.92 2092.78,1843.16 U2.37
  Top Layer w16: J2.5 J3.2
SIM_CLK: R18.2 U2.32 | length 145.7
  Top Layer w12: U2.32 2382.78,1673.16 2426.56,1716.94 R18.2
SIM_DATA: R19.1 U2.31 | length 139.2
  Top Layer w12: U2.31 2393.41,1633.79 2421.56,1661.94 R19.1
SIM_RST: R17.2 U2.33 | length 152.2
  Top Layer w12: U2.33 2372.15,1712.53 2431.56,1771.94 R17.2
SIM_VDD: C20.1 Designator1.1 U2.30 | length 515.1
  Top Layer w24: U2.30 2414.04,1594.42 2426.56,1606.94 C20.1 v1(2456.56,1556.94)
  Bottom Layer w24: v1(2456.56,1556.94) 2476.56,1556.94 2512.19,1592.57 2512.19,1854.53
SRXD: J7.3 J11.8 J12.1 | length 814.6
  Top Layer w12: 1536.56,421.94 1526.56,431.94 1536.56,441.94
  Top Layer w16: J7.3 1181.56,666.94 1326.56,521.94 1326.56,446.94 1341.56,431.94 1526.56,431.94 1536,431.94 ; J12.1 1536,431.94 ; J11.8@1536,481.38 J11.8 1536,431.94
STXD: J7.4 J8.1 J9.8 | length 620.4
  Top Layer w16: J7.4 1121.56,766.94 1376,512.49 J9.8
  Bottom Layer w16: J8.1 J9.8
VBAT: C4.+ C5.2 R4.2 R5.2 U1.4 U2.55 U2.56 U2.57 VBAT.1 | length 1738.9
  Top Layer w16: R4.2 1229.06,2181.94 1254.06,2156.94 C4.+
  Top Layer w80: C4.+ v2(1254.06,1959.44) 1254.06,1624.44 1284.06,1594.44 U2.56
  Bottom Layer w80: v2(1254.06,1959.44) 1376.56,2081.94 1379.06,2081.94 1381.56,2081.94 1814.06,2081.94 1876.56,2081.94 VBAT.1
VBOARD: J5.3 J6.4 VIN.CH1A VIN.CH2A | length 1453.1
  Top Layer w50: VIN.CH2A VIN.CH1A
  Bottom Layer w50: VIN.CH1A 866.55,1741.94 1306.56,2181.94 1576,2181.94 J5.3 J6.4
VDD_EXT: J1.9 Q2.2 Q2.4 R8.5 R8.6 U2.15 | length 2361.9
  Top Layer w10: Q2.4 1708.73,760.85 1720.24,749.34 1746.46,749.34 1758.72,761.6 Q2.2 ; R8.6 1936.22,768.41 1947.7,756.94 1957.87,756.94 1969.06,768.12 1969.06,779.01 R8.5
  Top Layer w12: v1(1786.56,831.94) 1799.06,844.44 1926.05,844.44 1968.72,801.76 R8.5
  Top Layer w16: Q2.2 1758.73,804.11 v1(1786.56,831.94) ; U2.15 2092.78,903.22 2129.06,866.94 v1(2131.56,866.94)
  Bottom Layer w16: v1(1786.56,831.94) 1821.56,866.94 1956.56,866.94 2031.56,791.94 2121.56,791.94 ; v1(2131.56,866.94) 2131.56,791.94 ; J1.9 3186.56,741.94 3186.56,846.94 3146.56,886.94 2936.56,886.94 2841.56,791.94 2141.56,791.94 ; 2121.56,791.94 2131.56,801.94 2141.56,791.94 ; 2121.56,791.94 2131.56,791.94 ; 2131.56,791.94 2141.56,791.94
VEXT: EXT_PWR.+ VIN.CH1B VIN.CH2B | length 747
  Top Layer w50: VIN.CH1B VIN.CH2B 466.56,1576.94 631.55,1411.94 631.55,1206.94 676.55,1161.94 EXT_PWR.+
VIN: C1.2 C2.2 C3.+ D2.+ D3.+ PWR.+ R7.2 U1.1 U1.2 VIN.COM1 VIN.COM2 | length 6106.7
  Top Layer w16: v1(1589.06,1681.94) 1589.06,1626.94 1656.56,1559.44 1656.56,1204.44 1346.56,894.44 1346.56,699.44 1466.56,579.44 2734.06,579.44 v1(2756.56,556.94) 2756.56,496.94 2741.56,481.94 D3.+ D2.+ ; R7.2 2359.06,684.44 2374.06,669.44 2751.56,669.44 v1(2756.56,674.44) ; v1(2381.56,2414.44) PWR.+
  Top Layer w40: C2.2 1076.56,1721.94 C3.+
  Top Layer w50: VIN.COM2 VIN.COM1 ; v1(981.55,1681.94) 1091.56,1681.94 C3.+ ; C3.+@1101.56,1691.94 C3.+ ; C3.+@1106.56,1696.94 C3.+
  Bottom Layer w16: v1(981.55,1681.94) v1(1589.06,1681.94) 1704.06,1681.94 2141.56,2119.44 2304.06,2119.44 2381.56,2196.94 v1(2381.56,2414.44) ; v1(2756.56,556.94) v1(2756.56,674.44)
  Bottom Layer w40: VIN.COM2 626.55,1681.94 v1(981.55,1681.94)
VRTC: C6.2 J14.+ U2.26 | length 1164.1
  Top Layer w16: U2.26 2416.56,1436.94 C6.2 v1(2426.56,1491.94)
  Bottom Layer w16: J14.+ 1846.56,911.94 v1(2426.56,1491.94)
pads on no net: Designator1.5 EXT_PWR.CDN J14. MIC. MIC.LS MIC.RS SPK. SPK.LS SPK.RS U2.16 U2.34
copper on no net: | length 1918.7
  Top Layer w2: 1031.56,1436.94 1131.56,1436.94 ; 1046.56,1411.94 1236.56,1411.94 ; 1046.56,1461.94 1516.56,1461.94 ; 1171.56,1431.94 1171.56,1321.94 cw(c1106.56,1321.94) 1106.56,1256.94 1011.56,1256.94 1011.56,1131.94 1151.56,1131.94 1151.56,1196.94 ccw(c1146.56,1286.94) 1236.56,1291.94 1236.56,1411.94 ; 1496.56,1411.94 1236.56,1411.94

## Keep-outs
Keep-Out Layer:
  lines w5: 356.56,306.94 ccw(c431.56,306.94) 431.56,231.94 3181.56,231.94 ccw(c3181.56,306.94) 3256.56,306.94 3256.56,2406.94 ccw(c3181.56,2406.94) 3181.56,2481.94 431.56,2481.94 ccw(c431.56,2406.94) 356.56,2406.94 356.56,306.94

## Other copper
Top Layer:
  rectangle: 1366.56,1376.94 1396.56,1381.94
  rectangle: 1366.56,1256.94 1401.56,1261.94
  rectangle: 1366.56,1296.94 1401.56,1301.94
  rectangle: 1366.56,1336.94 1401.56,1341.94
  rectangle: 1366.56,1491.94 1401.56,1496.94
  rectangle: 1361.56,1686.94 1406.56,1696.94
  rectangle: 1756.56,1881.94 1761.56,1936.94
  rectangle: 1726.56,1141.94 1971.56,1386.94
  rectangle: 1726.56,1141.94 1971.56,1386.94

## Silkscreen, mask and mechanical layers (free items; w line width, h text height)
Top Overlay:
  rectangle: 1491.56,661.94 1601.56,691.94
  rectangle: 1611.56,316.94 1661.56,331.94
  rectangle: 1611.56,531.94 1661.56,551.94
  rectangle: 1041.56,701.94 1051.56,736.94
  rectangle: 731.55,701.94 741.55,736.94
  rectangle: 856.55,816.94 921.55,841.94
  rectangle: 861.55,591.94 926.55,616.94
  region: 1426.56,331.94 1346.56,331.94 1346.56,316.94 1426.56,316.94
  region: 1561.56,331.94 1486.56,331.94 1486.56,316.94 1561.56,316.94
  lines w2: 2506.56,766.94 2596.56,766.94 ; 2736.56,1846.94 2736.56,1831.94 2516.56,1831.94 2516.56,2221.94 2736.56,2221.94 2736.56,2206.94 ; 556.55,691.94 556.55,746.94 731.55,746.94 731.55,691.94 556.55,691.94 ; 781.55,536.94 1001.56,536.94 1001.56,591.94 781.55,591.94 781.55,536.94 ; 781.55,841.94 781.55,896.94 1001.56,896.94 1001.56,841.94 781.55,841.94 ; 1051.56,691.94 1051.56,746.94 1276.56,746.94 1276.56,691.94 1051.56,691.94 ; 1336.56,251.94 1336.56,316.94 1571.56,316.94 1571.56,251.94 1336.56,251.94 ; 1586.56,251.94 2186.56,251.94 2186.56,316.94 1586.56,316.94 1586.56,251.94 ; 2451.56,706.94 2501.56,706.94 2501.56,656.94 2596.56,656.94 2596.56,706.94 2651.56,706.94 2651.56,831.94 2596.56,831.94 2596.56,884.44 2501.56,884.44 2501.56,831.94 2451.56,831.94 2451.56,706.94 ; 2751.56,1786.94 2751.56,2016.94 2901.56,2016.94 2901.56,1786.94 2751.56,1786.94
  lines w5: 2576.56,1906.94 2916.56,1906.94 ; 2576.56,1906.94 2576.56,1966.94 ; 2576.56,1906.94 2576.56,1846.94 2656.56,1846.94 ; 2576.56,1966.94 2916.56,1966.94 ; 2576.56,1966.94 2576.56,2026.94 ; 2576.56,2026.94 2916.56,2026.94 ; 2576.56,2026.94 2576.56,2086.94 ; 2576.56,2086.94 2916.56,2086.94 ; 2576.56,2086.94 2576.56,2146.94 ; 2576.56,2146.94 2916.56,2146.94 ; 2576.56,2146.94 2576.56,2206.94 2656.56,2206.94 ; 2656.56,1846.94 2656.56,2206.94 ; 2656.56,1846.94 2736.56,1846.94 ; 2656.56,2206.94 2736.56,2206.94 ; 2736.56,1846.94 2736.56,2206.94 ; 2736.56,1846.94 2916.56,1846.94 ; 2736.56,2206.94 2916.56,2206.94 ; 2916.56,1846.94 2916.56,1906.94 ; 2916.56,1846.94 2916.56,1831.94 3016.56,1831.94 ; 2916.56,1906.94 2916.56,1966.94 ; 2916.56,1966.94 2916.56,2026.94 ; 2916.56,2026.94 2916.56,2086.94 ; 2916.56,2086.94 2916.56,2146.94 ; 2916.56,2146.94 2916.56,2206.94 ; 2916.56,2206.94 2916.56,2431.94 3016.56,2431.94 ; 3016.56,1831.94 3016.56,2431.94 ; 3016.56,1831.94 3116.56,1831.94 3116.56,2431.94 3016.56,2431.94 ; 886.55,606.94 896.55,606.94 891.55,611.94 886.55,606.94 ; 886.55,826.94 891.55,821.94 896.55,826.94 886.55,826.94
  lines w6: 2441.56,751.94 2446.56,756.94 ; 2441.56,761.94 2446.56,756.94 ; 2446.56,756.94 2406.56,756.94 2406.56,1171.94 2466.56,1171.94 ; 2466.56,1171.94 2461.56,1176.94 2461.56,1166.94 2466.56,1171.94
  lines w10: 1281.56,1594.44 1331.56,1594.44 ; 1306.56,1569.44 1331.56,1594.44 ; 1306.56,1619.44 1331.56,1594.44
  text "F" at 1291,2411.94 h40 r180
  text "GND" at 2136.56,2366.94 h32
  text "M" at 1291,2306.94 h40 r180
  text "PWRKEY" at 2586.56,2271.94 h40
  text "4.1V" at 2136.56,2256.94 h32
  text "11" at 2641.56,2191.94 h32 r180
  text "12" at 2726.56,2191.94 h32 r180
  text "LNIn_L" at 2911.56,2191.94 h32 r180
  text "GPIO" at 2526.56,2171.94 h40 r270
  text "9" at 2626.56,2131.94 h32 r180
  text "10" at 2726.56,2131.94 h32 r180
  text "LNIn_R" at 2911.56,2131.94 h32 r180
  text "J13" at 3129.06,2116.94 h32
  text "J4" at 3036.56,2114.44 h32
  text "GND" at 2866.56,2076.94 h32 r180
  text "7" at 2626.56,2071.94 h32 r180
  text "8" at 2711.56,2071.94 h32 r180
  text "(2.8V)" at 2526.56,2016.94 h32 r270
  text "5" at 2626.56,2011.94 h32 r180
  text "6" at 2711.56,2011.94 h32 r180
  text "ADC" at 2866.56,2011.94 h32 r180
  text "PWM2" at 2881.56,1956.94 h32 r180
  text "3" at 2626.56,1951.94 h32 r180
  text "4" at 2711.56,1951.94 h32 r180
  text "1" at 2626.56,1891.94 h32 r180
  text "2" at 2711.56,1891.94 h32 r180
  text "PWM1" at 2881.56,1891.94 h32 r180
  text "(2.8V)" at 2901.56,1831.94 h32 r180
  text "GPIO" at 3066.56,1816.94 h40 r180
  text "EXT" at 406.56,1636.94 h35 r90
  text "Xduino" at 766.55,1591.94 h35 r90
  text "VBAT" at 1256.56,1539.44 h32 r90
  text "GPRS_TX" at 791.55,851.94 h32
  text "GND" at 3191.56,831.94 h32 r270
  text "RX" at 696.55,821.94 h32 r270
  text "RI" at 2971.56,796.94 h32 r180
  text "D7(RX)" at 1051.56,771.94 h32
  text "2V8" at 3191.56,716.94 h32 r270
  text "Xduino" at 566.55,701.94 h32
  text "SWserial" at 1061.56,701.94 h32
  text "DCD" at 2971.56,696.94 h32 r180
  text "TX" at 699.05,666.94 h32 r270
  text "D8(TX)" at 1051.56,646.94 h32
  text "DSR" at 2971.56,596.94 h32 r180
  text "TX" at 3186.56,566.94 h32
  text "D9" at 1656,561.94 h40 r90
  text "GPRS_RX" at 791.55,546.94 h32
  text "(RX)" at 1376,541.94 h40 r90
  text "D7" at 1431,541.94 h40 r90
  text "D8" at 1521,541.94 h40 r90
  text "(TX)" at 1576,541.94 h40 r90
  text "F" at 1476,501.94 h40 r180
  text "CTS" at 2971.56,496.94 h32 r180
  text "RX" at 3186.56,461.94 h32
  text "NetLight" at 2816.56,441.94 h32 r90
  text "DTR" at 3191.56,416.94 h32 r270
  text "M" at 1476,401.94 h40 r180
  text "RTS" at 2971.56,396.94 h32 r180
  text "SWserial" at 1556.56,301.94 h32 r180
  text "UART(2V8)" at 3226.56,301.94 h40 r180
  text "PWRKEY if JP soldered" at 1596.56,266.94 h32
  text "Status" at 2814.06,251.94 h32 r90
Bottom Overlay:
  lines w5: 386.56,286.94 476.56,286.94 476.56,526.94 731.55,526.94 731.55,731.94 386.56,731.94 386.56,286.94 ; 741.55,616.94 741.55,816.94 1041.56,816.94 1041.56,616.94 741.55,616.94
  text "GPRS Shield" at 1881.56,1676.94 h70
  text "v1.4 by Seeed Studio 09A12" at 1881.56,1581.94 h50
  text "www.seeedstudio.com" at 1881.56,1506.94 h50
  text "Made in China" at 1881.56,1431.94 h50
  text "3V CR1220" at 1486.56,1236.94 h40
  text "SIMHOLDER" at 2346.56,1146.94 h40 r90
  text "SIM Card Holder" at 2731.56,961.94 h50 r90
  text "SIM900 UART" at 2961.56,771.94 h40 r270
  text "2V8 Logic" at 3231.56,741.94 h40 r270
  text "DISP_CLK" at 496.56,721.94 h32 r180
  text "DISP_DATA" at 721.55,641.94 h32
  text "5V Logic" at 761.55,596.94 h40 r180
  text "DISP_D/C" at 721.55,591.94 h32
  text "DISP_CS" at 721.55,536.94 h32
Mechanical 2:
  lines w5: 1066.56,991.94 1166.56,891.94 1166.56,441.94 1226.56,381.94 3766.56,381.94 3766.56,2481.94 1166.56,2481.94 1166.56,2381.94 1066.56,2281.94 1066.56,991.94

## Text inside footprints (layer, text, board x,y; h text height)
EXT_PWR: Mechanical 1 "1 Slot Hole without copper" at 356.56,1611.94 h32 r270; Mechanical 1 "3 Slot drills with copper" at 606.55,1636.94 h32 r270
U2: Top Overlay "Keep route out area" at 1545.53,1342.45 h10 r90; Top Overlay "the bottom side of the module" at 1848.68,1141.66 h10 r90; Top Overlay "customer board and the test points on" at 1832.93,1141.66 h10 r90; Top Overlay "to prevent form the short  between the via on" at 1817.19,1141.66 h10 r90; Top Overlay "This area should be covered by silkscreen" at 1801.44,1141.66 h10 r90